# EAGLE board scrump (EAGLE 7.7.0)

Size 100 x 80 mm. Coordinates in mm from the lower left corner, seen from the top.
Outline: 0,0 100,0 100,80 0,80 0,0
Copper layers (1*16): Top 0.035mm / dielectric 1.5mm / Bottom 0.035mm
Design rules "default": minimum track width 10mil, minimum drill 24mil, track to track 8mil, track to pad 8mil, pad to pad 8mil, via to via 8mil, smd to smd 8mil, copper to edge 40mil, drill to drill 8mil, minimum pad ring 10mil, minimum via ring 8mil, stop-mask expansion 4mil, vias tented up to drill 0mil, thermal gap 10mil

## Footprints (pad centres in the part's own frame; a part is rotated, then mirrored left to right if it is on the bottom)
BMP180_BREAKOUT = drill 1.016: 1 2.54,1.27; 2 5.08,1.27; 3 7.62,1.27; 4 10.16,1.27; 5 12.7,1.27
0603-CAP = smd 1.1 x 1: 1 -0.85,0; 2 0.85,0
SMA-DIODE = smd 1.27 x 1.47: A -2.15,0; C 2.15,0
LED-0603 = smd 1 x 1: A 0,-0.877; C 0,0.877
FTSH-105-01-XXX-DV-K = smd 0.737 x 2.794: 1 -2.54,-2.032; 2 -2.54,2.032; 3 -1.27,-2.032; 4 -1.27,2.032; 5 0,-2.032; 6 0,2.032; 7 1.27,-2.032; 8 1.27,2.032; 9 2.54,-2.032; 10 2.54,2.032
USB-MICRO-MOLEX-105017-0001 = smd 0.4 x 1.35: 1 1.2,0; 2 1.85,0; 3 2.5,0; 4 3.15,0; 5 3.8,0 | drill 0.85 pad 1.45: P$1 0,0; P$2 5,0 | smd 1.5 x 1.9: P$3 3.5,-2.7; P$4 1.5,-2.7
0806-INDUCTOR = smd 0.8 x 1.8: 1 -0.9,0; 2 0.9,0
0603-RES = smd 1.1 x 1: 1 -0.85,0; 2 0.85,0
TACTILE-SMD-SWITCH = smd 1.6 x 1.4: P$1 -4.2,2.25; P$2 4.2,2.25; P$3 4.2,-2.25; P$4 -4.2,-2.25
TQFP-48 = smd 1.5 x 0.28: 1 -4.25,2.75; 2 -4.25,2.25; 3 -4.25,1.75; 4 -4.25,1.25; 5 -4.25,0.75; 6 -4.25,0.25; 7 -4.25,-0.25; 8 -4.25,-0.75; 9 -4.25,-1.25; 10 -4.25,-1.75; 11 -4.25,-2.25; 12 -4.25,-2.75; 25 4.25,-2.75; 26 4.25,-2.25; 27 4.25,-1.75; 28 4.25,-1.25; 29 4.25,-0.75; 30 4.25,-0.25; 31 4.25,0.25; 32 4.25,0.75; 33 4.25,1.25; 34 4.25,1.75; 35 4.25,2.25; 36 4.25,2.75 | smd 0.28 x 1.5: 13 -2.75,-4.25; 14 -2.25,-4.25; 15 -1.75,-4.25; 16 -1.25,-4.25; 17 -0.75,-4.25; 18 -0.25,-4.25; 19 0.25,-4.25; 20 0.75,-4.25; 21 1.25,-4.25; 22 1.75,-4.25; 23 2.25,-4.25; 24 2.75,-4.25; 37 2.75,4.25; 38 2.25,4.25; 39 1.75,4.25; 40 1.25,4.25; 41 0.75,4.25; 42 0.25,4.25; 43 -0.25,4.25; 44 -0.75,4.25; 45 -1.25,4.25; 46 -1.75,4.25; 47 -2.25,4.25; 48 -2.75,4.25
SOT23-5 = smd 0.55 x 1.2: 1 -0.95,-1.3; 2 0,-1.3; 3 0.95,-1.3; 4 0.95,1.3; 5 -0.95,1.3
ABS25 = smd 1.9 x 1.3: P$1 -2.75,-1.6; P$2 2.75,-1.6; P$3 2.75,1.6; P$4 -2.75,1.6

## Placement (x,y rotation side)
B1  BMP180BREAKOUT  [BMP180_BREAKOUT]  74.93,45.72 0 top
C1  0.1uF  [0603-CAP]  10.16,16.51 0 top
C2  10uF  [0603-CAP]  21.59,3.81 0 top
C3  1.0uF  [0603-CAP]  22.86,11.43 0 top
C4  0.1uF  [0603-CAP]  15.24,2.54 0 top
C5  0.1uF  [0603-CAP]  7.62,2.54 0 top
C6  22pF  [0603-CAP]  63.5,10.16 0 top
C7  22pF  [0603-CAP]  68.58,11.43 0 top
C8  0.1uF  [0603-CAP]  7.62,7.62 0 top
C9  4.7uF  [0603-CAP]  41.91,34.29 0 top
C10  4.7uF  [0603-CAP]  29.21,21.59 0 top
C11  4.7uF  [0603-CAP]  29.21,7.62 0 top
C12  10uF  [0603-CAP]  44.45,12.7 0 top
C13  0.1uF  [0603-CAP]  71.12,38.1 0 top
D1  MBRA140  [SMA-DIODE]  34.29,27.94 0 top
D2  RED 1.8V  [LED-0603]  54.61,19.05 0 top
J1  PINHEAD-FTSH  [FTSH-105-01-XXX-DV-K]  44.45,22.86 0 top
J2  USB-CON-5PIN-105017-0001  [USB-MICRO-MOLEX-105017-0001]  34.29,5.08 0 top
L1  2.2uF  [0806-INDUCTOR]  31.75,12.7 0 top
R1  22R  [0603-RES]  85.09,26.67 0 top
R2  330R  [0603-RES]  5.08,17.78 0 top
R3  1.5k  [0603-RES]  49.53,35.56 0 top
R4  2k  [0603-RES]  54.61,27.94 0 top
R5  22R  [0603-RES]  55.88,33.02 0 top
S1  PUSHBUTTON-SMD  [TACTILE-SMD-SWITCH]  24.13,30.48 0 top
U1  ATSAMD21G-A  [TQFP-48]  19.05,17.78 0 top
U2  LM3671  [SOT23-5]  36.83,12.7 0 top
U3  MCP73831  [SOT23-5]  36.83,19.05 0 top
Y1  32.768kHz  [ABS25]  52.07,6.35 0 top

## Library data of the parts
B1 J1 J2 L1 S1 U2 U3 Y1 = mylibrary
C1-C7 C9-C13 = SparkFun-Capacitors
C8 = SparkFun-Capacitors; PROD_ID: CAP-00810
D1 = SparkFun-DiscreteSemi; PROD_ID: DIO-08053
D2 = SparkFun-LED; PROD_ID: DIO-00819
R1-R5 = SparkFun-Resistors
U1 = SparkFun-DigitalIC; PROD_ID: IC-13064

## Nets
+3V3: B1.2 C1.1 C2.1 C4.1 C5.1 C12.1 C13.1 J1.1 L1.1 U1.6 U1.17 U1.36 U1.44 U2.4
+5V: C11.1 D1.A J2.1
D+: R5.2 U1.34
D-: R1.2 U1.33
GND: B1.3 C1.2 C2.2 C3.2 C4.2 C5.2 C6.2 C7.2 C8.2 C9.2 C10.2 C11.2 C12.2 C13.2 J1.3 J1.5 J1.9 J2.5 R4.1 S1.P$3 S1.P$4 U1.5 U1.18 U1.35 U1.42 U2.2 U3.2
N$1: C3.1 U1.43
N$2: R2.2 S1.P$1 S1.P$2
N$3: C9.1 D1.C R3.2 U3.4
N$4: J2.3 R5.1
N$5: L1.2 U2.5
N$6: D2.C U3.1
N$7: D2.A R3.1
N$8: R4.2 U3.5
N$9: J2.2 R1.1
PA00: C6.1 U1.1 Y1.P$1
PA01: C7.1 U1.2 Y1.P$4
PA02: U1.3
PA03: U1.4
PA04: U1.9
PA05: U1.10
PA06: U1.11
PA07: U1.12
PA08: U1.13
PA09: U1.14
PA10: U1.15
PA11: U1.16
PA12: U1.21
PA13: U1.22
PA14: U1.23
PA15: U1.24
PA16: U1.25
PA17: U1.26
PA18: U1.27
PA19: U1.28
PA20: U1.29
PA21: U1.30
PA27: U1.39
PA28: U1.41
PB02: U1.47
PB03: U1.48
PB08: U1.7
PB09: U1.8
PB10: U1.19
PB11: U1.20
PB22: U1.37
PB23: U1.38
RESET: C8.1 J1.10 R2.1 U1.40
SCL: B1.4 U1.32
SDA: B1.5 U1.31
SWCLK: J1.4 U1.45
SWDIO: J1.2 U1.46
USBID: J2.4
VCC: C10.1 U2.1 U2.3 U3.3

## Tracks (layer width: path | path; a pad name or v marks a point on that pad's centre or on a via)
+3V3  (13 unrouted)
+5V  (2 unrouted)
D+  (1 unrouted)
D-  (1 unrouted)
GND  (26 unrouted)
N$1  (1 unrouted)
N$2  (2 unrouted)
N$3  (3 unrouted)
N$4  (1 unrouted)
N$5  (1 unrouted)
N$6  (1 unrouted)
N$7  (1 unrouted)
N$8  (1 unrouted)
N$9  (1 unrouted)
PA00  (2 unrouted)
PA01  (2 unrouted)
RESET  (3 unrouted)
SCL  (1 unrouted)
SDA  (1 unrouted)
SWCLK  (1 unrouted)
SWDIO  (1 unrouted)
VCC  (3 unrouted)